# EAGLE board Wifi Circuit (EAGLE 9.6.2)

Size 160 x 100 mm. Coordinates in mm from the lower left corner, seen from the top.
Outline: 0,0 160,0 160,100 0,100 0,0
Copper layers (1*16): Top 0.035mm / dielectric 1.5mm / Bottom 0.035mm
Design rules "default": minimum track width 6mil, minimum drill 0.35mm, track to track 6mil, track to pad 6mil, pad to pad 6mil, via to via 6mil, smd to smd 6mil, copper to edge 40mil, drill to drill 6mil, minimum pad ring 10mil, minimum via ring 8mil, stop-mask expansion 4mil, vias tented up to drill 0mil, thermal gap 10mil

## Footprints (pad centres in the part's own frame; a part is rotated, then mirrored left to right if it is on the bottom)
LED_3MM = drill 0.813 pad 1.88: A -1.27,0; K 1.27,0
R0805 = smd 1.3 x 1.5: 1 -0.95,0; 2 0.95,0
ATMEL_ATWINC1500-MR210PA = smd 0.8 x 1.9: J1 -8.189,-7.368; J2 -7.173,-7.368; J3 -6.157,-7.368; J4 -5.141,-7.368; J5 -1.077,-7.368; J6 0.955,-7.368; J7 1.971,-7.368; J8 2.987,-7.368; J9 4.003,-7.368; J10 1.962,7.362; J11 0.946,7.362; J12 -0.07,7.362; J13 -1.086,7.362; J14 -2.102,7.362; J15 -3.118,7.362; J16 -4.134,7.362; J17 -5.15,7.362; J18 -6.166,7.362; J19 -7.182,7.362 | smd 1.9 x 0.8: J20 -10.861,5.462; J21 -10.861,2.414; J22 -10.861,1.398; J23 -10.861,0.382; J24 -10.861,-0.634; J25 -10.861,-1.65; J26 -10.861,-2.666; J27 -10.861,-3.682; J28 -10.861,-4.698

## Placement (x,y rotation side)
D1  [LED_3MM]  -15.24,25.4 0 top  (outside the outline)
D2  [LED_3MM]  -20.32,25.4 0 top  (outside the outline)
D3  [LED_3MM]  -25.4,25.4 0 top  (outside the outline)
R1  [R0805]  -30.48,24.13 0 top  (outside the outline)
R2  [R0805]  -35.56,24.13 0 top  (outside the outline)
R3  [R0805]  -15.24,30.48 0 top  (outside the outline)
R4  [R0805]  -20.32,30.48 0 top  (outside the outline)
R5  [R0805]  -25.4,30.48 0 top  (outside the outline)
R6  [R0805]  -30.48,30.48 0 top  (outside the outline)
R7  [R0805]  -35.56,30.48 0 top  (outside the outline)
R8  [R0805]  -15.24,35.56 0 top  (outside the outline)
R9  [R0805]  -35.56,-3.81 0 top  (outside the outline)
R10  [R0805]  -35.56,-8.89 0 top  (outside the outline)
U$1  ATWINC1500-MR210PA  [ATMEL_ATWINC1500-MR210PA]  -24.13,11.43 0 top  (outside the outline)

## Library data of the parts
D1-D3 = SparkFun-LED; PROD_ID: DIO-08794
R1-R10 = rcl; SPICEPREFIX: R
U$1 = ATWINC1500-MR210PA; AVAILABILITY: In Stock; DESCRIPTION: WiFi 802.11b/g/n Transceiver Module 2.4GHz Integrated, Trace Surface Mount; MF: Microchip Technology; MP: ATWINC1500-MR210PA; PACKAGE: None; PRICE: None

## Nets
!(ATWINC_RESET_3V): U$1.J4
+3V3: D1.A D2.A D3.A R1.2 R3.2 R5.2 U$1.J20 U$1.J23
ATWINC_ENABLE_3V: R1.1 R10.2 U$1.J22
ATWINCE_CHIP_ENABLE_3V: R10.1
D12: U$1.J3
GND: U$1.J9 U$1.J12 U$1.J28
MISO: U$1.J15
MOSI_3V: U$1.J17
N$2: R9.2 U$1.J11
N$4: R5.1 U$1.J10
N$5: R3.1 U$1.J13
N$6: U$1.J16
N$8: U$1.J19
N$9: U$1.J21
N$10: D3.K U$1.J26
N$11: D1.K U$1.J27
N$12: D2.K U$1.J1
N$13: U$1.J2
N$19: U$1.J14
N$20: U$1.J24
SCK_3V: U$1.J18
WAKE_3V: R9.1

## Tracks (layer width: path | path; a pad name or v marks a point on that pad's centre or on a via)
+3V3  (7 unrouted)
ATWINC_ENABLE_3V  (2 unrouted)
GND  (2 unrouted)
N$2  (1 unrouted)
N$4  (1 unrouted)
N$5  (1 unrouted)
N$10  (1 unrouted)
N$11  (1 unrouted)
N$12  (1 unrouted)